# Altium PCB AudioAmpPCB.PcbDoc (part 1 of 2)
Units mm, origin at the board's own origin, x right, y up, seen from the top; angles counter-clockwise.
Board outline 120 x 80 mm, 2 copper layers (Top Layer, Bottom Layer); 101 components, 39 nets, 208 pads, 0 vias.
Unrouted connection lines stored in the file: 151.
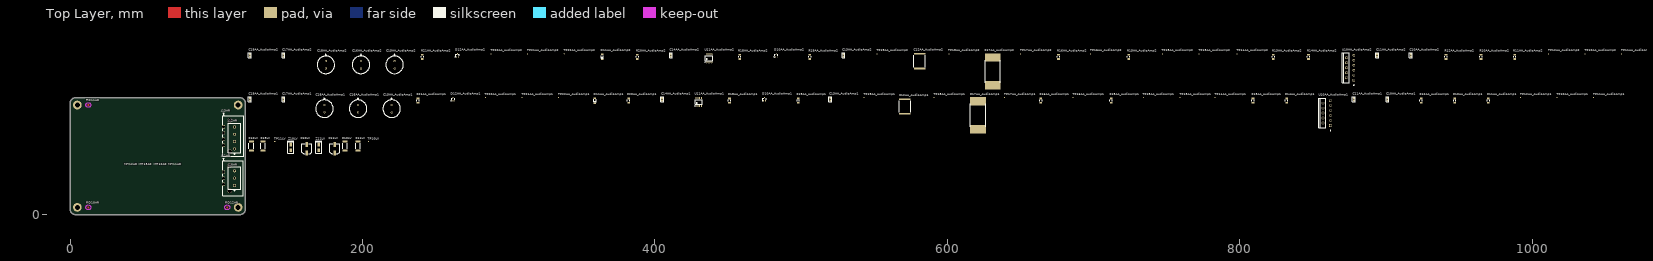
[diagram p0: Top Layer view]
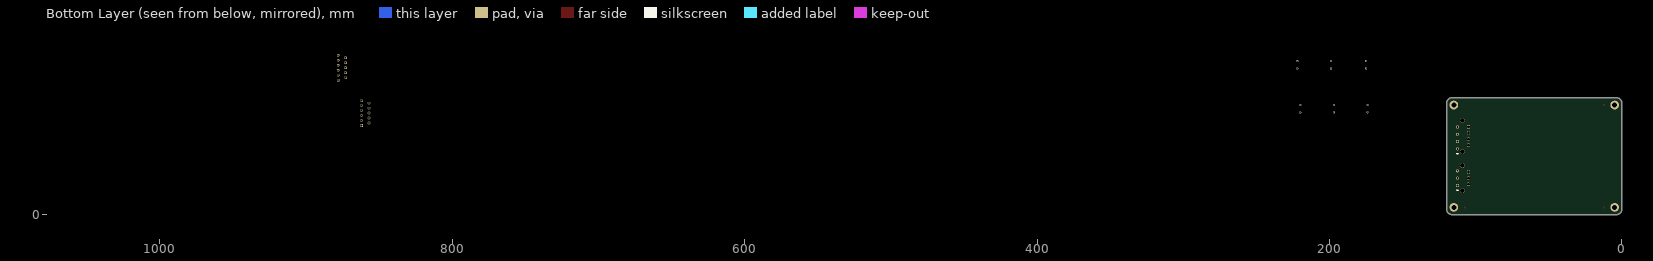
[diagram p1: Bottom Layer view, seen from below]

## Layer stack, top to bottom
Top Solder: solder mask 0.0102, Solder Resist, Dk 3.5
Top Layer: signal copper 0.0356
Dielectric 1: dielectric 0.32, FR-4, Dk 4.8
Bottom Layer: signal copper 0.0356
Bottom Solder: solder mask 0.0102, Solder Resist, Dk 3.5

## Board outline
0,4 ccw(c4,4) 4,0 116,0 ccw(c116,4) 120,4 120,76 ccw(c116,76) 116,80 4,80 ccw(c4,76) 0,76

## Design rules (kind name [scope] priority, off if disabled: settings)
Clearance [All] p1: gap=0.254 ignorepadtopadclearanceinfootprint=FALSE except(0: Arc-Hole Track-Hole SMDPad-Hole THPad-Hole Via-Hole Fill-Hole Poly-Hole Region-Hole Text-Hole)
PolygonConnect [All] p1: connectstyle=Relief reliefconductorwidth=0.254 reliefentries=4 polygonreliefangle="90 Angle" airgapwidth=0.254
RoomDefinition OASupply [InComponentClass('OASupply')] p1: confinementstyle=ConfineIn formatcopy=TRUE lockcomponents=FALSE outline 121,39 213,39 213,54 121,54
RoomDefinition AudioAmp2 [InComponentClass('AudioAmp2')] p2: confinementstyle=ConfineIn formatcopy=TRUE lockcomponents=FALSE outline 121,85 1085.001,85 1085.001,115 121,115
RoomDefinition AudioAmp1 [InComponentClass('AudioAmp1')] p3: confinementstyle=ConfineIn formatcopy=TRUE lockcomponents=FALSE outline 121,55 1065.001,55 1065.001,84 121,84
RoutingVias [All] p1: holewidth=0.711 width=1.27 viastyle="Through Hole" minholewidth=0.711 minwidth=1.27 maxholewidth=0.711 maxwidth=1.27
SolderMaskExpansion [All] p1: expansion=0.102 istentingtop=FALSE
Width [All] p1: maxlimit=0.254 minlimit=0.254 preferedwidth=0.254
30 further rules are at their usual default settings.

## Classes and differential pairs
channel class AudioAmplifier: AudioAmp1 AudioAmp2
component class OASupply: C10LV C11LV R10LV R11LV R12LV R13LV TP10LV TP11LV Z10LV Z11LV
component class Architecture: FID10AR FID11AR FID12AR J10AR J11AR J12AR J13AR MH10AR MH11AR MH12AR MH13AR
component class AudioAmp1: C10AA_AudioAmp1 C11AA_AudioAmp1 C12AA_AudioAmp1 C13AA_AudioAmp1 C14AA_AudioAmp1 C15AA_AudioAmp1 C16AA_AudioAmp1 C17AA_AudioAmp1 C18AA_AudioAmp1 C19AA_AudioAmp1 D10AA_AudioAmp1 D11AA_AudioAmp1 D12AA_AudioAmp1 R10AA_AudioAmp1 R11AA_AudioAmp1 R12AA_AudioAmp1 R13AA_AudioAmp1 R14AA_AudioAmp1 R15AA_AudioAmp1 R16AA_AudioAmp1 R17AA_AudioAmp1 R18AA_AudioAmp1 R19AA_AudioAmp1 R20AA_AudioAmp1 R21AA_AudioAmp1 TP10AA_AudioAmp1 TP11AA_AudioAmp1 TP12AA_AudioAmp1 TP13AA_AudioAmp1 TP14AA_AudioAmp1 TP15AA_AudioAmp1 TP16AA_AudioAmp1 TP17AA_AudioAmp1 TP18AA_AudioAmp1 TP19AA_AudioAmp1 TP20AA_AudioAmp1 TP21AA_AudioAmp1 TP22AA_AudioAmp1 U10AA_AudioAmp1 U11AA_AudioAmp1
component class AudioAmp2: C10AA_AudioAmp2 C11AA_AudioAmp2 C12AA_AudioAmp2 C13AA_AudioAmp2 C14AA_AudioAmp2 C15AA_AudioAmp2 C16AA_AudioAmp2 C17AA_AudioAmp2 C18AA_AudioAmp2 C19AA_AudioAmp2 D10AA_AudioAmp2 D11AA_AudioAmp2 D12AA_AudioAmp2 R10AA_AudioAmp2 R11AA_AudioAmp2 R12AA_AudioAmp2 R13AA_AudioAmp2 R14AA_AudioAmp2 R15AA_AudioAmp2 R16AA_AudioAmp2 R17AA_AudioAmp2 R18AA_AudioAmp2 R19AA_AudioAmp2 R20AA_AudioAmp2 R21AA_AudioAmp2 TP10AA_AudioAmp2 TP11AA_AudioAmp2 TP12AA_AudioAmp2 TP13AA_AudioAmp2 TP14AA_AudioAmp2 TP15AA_AudioAmp2 TP16AA_AudioAmp2 TP17AA_AudioAmp2 TP18AA_AudioAmp2 TP19AA_AudioAmp2 TP20AA_AudioAmp2 TP21AA_AudioAmp2 TP22AA_AudioAmp2 U10AA_AudioAmp2 U11AA_AudioAmp2

## Components (designator, comment, footprint, x,y, rotation, side; value= is the part's Value field where it differs from the comment)
C10AA_AudioAmp1 "GRM21A5C2D100JW01D" CAPC2012X10N-GRM0805-MURATA 901.001,79 r90 top (schematic designator C10AA)
C10AA_AudioAmp2 "GRM21A5C2D100JW01D" CAPC2012X10N-GRM0805-MURATA 917.001,109 r90 top (schematic designator C10AA)
C10LV "EEE-TQV101XAP" CAPAE7866X80M-PANASONIC-TQ-A 162,45 r90 top
C11AA_AudioAmp1 "GRM219R72A102KA01D" CAPC2012X10N-GRM0805-MURATA 878,79 r90 top (schematic designator C11AA)
C11AA_AudioAmp2 "GRM219R72A102KA01D" CAPC2012X10N-GRM0805-MURATA 894.001,109 r90 top (schematic designator C11AA)
C11LV "EEE-TQV101XAP" CAPAE7866X80M-PANASONIC-TQ-A 181,45 r90 top
C12AA_AudioAmp1 "SMDTC04100VA00KR00" Chip2PinSM127P600-8N-4030-SMD-PET-WIMA 571,74 r90 top (schematic designator C12AA)
C12AA_AudioAmp2 "SMDTC04100VA00KR00" Chip2PinSM127P600-8N-4030-SMD-PET-WIMA 581,105 r90 top (schematic designator C12AA)
C13AA_AudioAmp1 "GRM219R72A221KA01D" CAPC2012X10N-GRM0805-MURATA 520,79 r90 top (schematic designator C13AA)
C13AA_AudioAmp2 "GRM219R72A221KA01D" CAPC2012X10N-GRM0805-MURATA 529,109 r90 top (schematic designator C13AA)
C14AA_AudioAmp1 "GRM21A5C2D220JW01D" CAPC2012X10N-GRM0805-MURATA 405,79 r90 top (schematic designator C14AA)
C14AA_AudioAmp2 "GRM21A5C2D220JW01D" CAPC2012X10N-GRM0805-MURATA 411,109 r90 top (schematic designator C14AA)
C15AA_AudioAmp1 "ESH227M063AH4AA" Capacitor-KEMET-H4 220,70 r90 top (schematic designator C15AA)
C15AA_AudioAmp2 "ESH227M063AH4AA" Capacitor-KEMET-H4 222,100 r90 top (schematic designator C15AA)
C16AA_AudioAmp1 "ESH227M063AH4AA" Capacitor-KEMET-H4 197,70 r90 top (schematic designator C16AA)
C16AA_AudioAmp2 "ESH227M063AH4AA" Capacitor-KEMET-H4 199,100 r90 top (schematic designator C16AA)
C17AA_AudioAmp1 "GRM219R72A103KA01D" CAPC2012X10N-GRM0805-MURATA 146,79 r90 top (schematic designator C17AA)
C17AA_AudioAmp2 "GRM219R72A103KA01D" CAPC2012X10N-GRM0805-MURATA 146,109 r90 top (schematic designator C17AA)
C18AA_AudioAmp1 "ESH227M063AH4AA" Capacitor-KEMET-H4 174,70 r90 top (schematic designator C18AA)
C18AA_AudioAmp2 "ESH227M063AH4AA" Capacitor-KEMET-H4 175,100 r90 top (schematic designator C18AA)
C19AA_AudioAmp1 "GRM21BR72A104KAC4L" CAPC2012X10N-GRM0805-MURATA 123,79 r90 top (schematic designator C19AA)
C19AA_AudioAmp2 "GRM21BR72A104KAC4L" CAPC2012X10N-GRM0805-MURATA 123,109 r90 top (schematic designator C19AA)
D10AA_AudioAmp1 "BAV99W,LF" SOT65P210X100-3N-SOT-323-TOSHIBA 475,79 r90 top (schematic designator D10AA)
D10AA_AudioAmp2 "BAV99W,LF" SOT65P210X100-3N-SOT-323-TOSHIBA 483,109 r90 top (schematic designator D10AA)
D11AA_AudioAmp1 "BZV55-C27,115" DIOMELF3515N-SOD80C-NEXPERIA 359,78 r90 top (schematic designator D11AA)
D11AA_AudioAmp2 "BZV55-C27,115" DIOMELF3515N-SOD80C-NEXPERIA 364,108 r90 top (schematic designator D11AA)
D12AA_AudioAmp1 "BAV99W,LF" SOT65P210X100-3N-SOT-323-TOSHIBA 262,79 r90 top (schematic designator D12AA)
D12AA_AudioAmp2 "BAV99W,LF" SOT65P210X100-3N-SOT-323-TOSHIBA 265,109 r90 top (schematic designator D12AA)
FID10AR "FIDUCIAL_1mm" FID_1mm 12.5,5 r90 top
FID11AR "FIDUCIAL_1mm" FID_1mm 12.5,75 r90 top
FID12AR "FIDUCIAL_1mm" FID_1mm 107.5,5 r90 top
J10AR "282836-3" 282836-3_TYC 112.5,20 r90 top
J11AR "39-30-3032" CON_39303032 105,29.2 r90 top
J12AR "282836-4" 282836-4_TYC 112.5,45 r90 top
J13AR "39-30-3041" CON_39303041 105,60.1 r90 top
MH10AR "MetricDrillM3" MetricM3Hole#1 60,30 r90 top
MH11AR "MetricDrillM3" MetricM3Hole#2 70,30 r0 top
MH12AR "MetricDrillM3" MetricM3Hole#3 40,30 r90 top
MH13AR "MetricDrillM3" MetricM3Hole#2 50,30 r90 top
R10AA_AudioAmp1 "RK73H2BTTD4702F" Chip2PinSM127P600-8N-RK73H-1206-KOA 947.001,78 r90 top (schematic designator R10AA)
R10AA_AudioAmp2 "RK73H2BTTD4702F" Chip2PinSM127P600-8N-RK73H-1206-KOA 965.001,108 r90 top (schematic designator R10AA)
R10LV "ERJ-U1TF1101U" Chip2PinSM127P600-8N-PANASONIC-ERJU1T 188,47 r90 top
R11AA_AudioAmp1 "RK73B2BTTDD223J" Chip2PinSM127P600-8N-RK73H-1206-KOA 970.001,78 r90 top (schematic designator R11AA)
R11AA_AudioAmp2 "RK73B2BTTDD223J" Chip2PinSM127P600-8N-RK73H-1206-KOA 988.001,108 r90 top (schematic designator R11AA)
R11LV "ERJ-U1TF1101U" Chip2PinSM127P600-8N-PANASONIC-ERJU1T 197,47 r90 top
R12AA_AudioAmp1 "RK73B2BTTDD223J" Chip2PinSM127P600-8N-RK73H-1206-KOA 924.001,78 r90 top (schematic designator R12AA)
R12AA_AudioAmp2 "RK73B2BTTDD223J" Chip2PinSM127P600-8N-RK73H-1206-KOA 941.001,108 r90 top (schematic designator R12AA)
R12LV "ERJ-U1TF1101U" Chip2PinSM127P600-8N-PANASONIC-ERJU1T 124,47 r90 top
R13AA_AudioAmp1 "SG732BTTD474K" Chip2PinSM127P600-8N-RK73H-1206-KOA 809,78 r90 top (schematic designator R13AA)
R13AA_AudioAmp2 "SG732BTTD474K" Chip2PinSM127P600-8N-RK73H-1206-KOA 823,108 r90 top (schematic designator R13AA)
R13LV "ERJ-U1TF1101U" Chip2PinSM127P600-8N-PANASONIC-ERJU1T 132,47 r90 top
R14AA_AudioAmp1 "RK73B2BTTDD332J" Chip2PinSM127P600-8N-RK73H-1206-KOA 832,78 r90 top (schematic designator R14AA)
R14AA_AudioAmp2 "RK73B2BTTDD332J" Chip2PinSM127P600-8N-RK73H-1206-KOA 847,108 r90 top (schematic designator R14AA)
R15AA_AudioAmp1 "RK73H2BTTD4702F" Chip2PinSM127P600-8N-RK73H-1206-KOA 712,78 r90 top (schematic designator R15AA)
R15AA_AudioAmp2 "RK73H2BTTD4702F" Chip2PinSM127P600-8N-RK73H-1206-KOA 724,108 r90 top (schematic designator R15AA)
R16AA_AudioAmp1 "RK73B2BTTDD332J" Chip2PinSM127P600-8N-RK73H-1206-KOA 664,78 r90 top (schematic designator R16AA)
R16AA_AudioAmp2 "RK73B2BTTDD332J" Chip2PinSM127P600-8N-RK73H-1206-KOA 676,108 r90 top (schematic designator R16AA)
R17AA_AudioAmp1 "RWS7 R47 J T&R" Chip2PinSM127P600-8N-RWS7-OHMITE 621,68 r90 top (schematic designator R17AA)
R17AA_AudioAmp2 "RWS7 R47 J T&R" Chip2PinSM127P600-8N-RWS7-OHMITE 631,98 r90 top (schematic designator R17AA)
R18AA_AudioAmp1 "RK73B2BTTDD104J" Chip2PinSM127P600-8N-RK73H-1206-KOA 451,78 r90 top (schematic designator R18AA)
R18AA_AudioAmp2 "RK73B2BTTDD104J" Chip2PinSM127P600-8N-RK73H-1206-KOA 458,108 r90 top (schematic designator R18AA)
R19AA_AudioAmp1 "RK73B2BTTDD223J" Chip2PinSM127P600-8N-RK73H-1206-KOA 498,78 r90 top (schematic designator R19AA)
R19AA_AudioAmp2 "RK73B2BTTDD223J" Chip2PinSM127P600-8N-RK73H-1206-KOA 506,108 r90 top (schematic designator R19AA)
R20AA_AudioAmp1 "RK73B2BTTD103G" Chip2PinSM127P600-8N-RK73H-1206-KOA 382,78 r90 top (schematic designator R20AA)
R20AA_AudioAmp2 "RK73B2BTTD103G" Chip2PinSM127P600-8N-RK73H-1206-KOA 388,108 r90 top (schematic designator R20AA)
R21AA_AudioAmp1 "RK73B2BTTDD391J" Chip2PinSM127P600-8N-RK73H-1206-KOA 238,78 r90 top (schematic designator R21AA)
R21AA_AudioAmp2 "RK73B2BTTDD391J" Chip2PinSM127P600-8N-RK73H-1206-KOA 241,108 r90 top (schematic designator R21AA)
TP10AA_AudioAmp1 "TP_0.75mm" Pad_0.75mm 1017.001,80 r90 top (schematic designator TP10AA)
TP10AA_AudioAmp2 "TP_0.75mm" Pad_0.75mm 1036.001,110 r90 top (schematic designator TP10AA)
TP10LV "TP_0.75mm" Pad_0.75mm 204,50 r90 top
TP11AA_AudioAmp1 "TP_0.75mm" Pad_0.75mm 1042.001,80 r90 top (schematic designator TP11AA)
TP11AA_AudioAmp2 "TP_0.75mm" Pad_0.75mm 1061.001,110 r90 top (schematic designator TP11AA)
TP11LV "TP_0.75mm" Pad_0.75mm 140,50 r90 top
TP12AA_AudioAmp1 "TP_0.75mm" Pad_0.75mm 992.001,80 r90 top (schematic designator TP12AA)
TP12AA_AudioAmp2 "TP_0.75mm" Pad_0.75mm 1011.001,110 r90 top (schematic designator TP12AA)
TP13AA_AudioAmp1 "TP_0.75mm" Pad_0.75mm 759,80 r90 top (schematic designator TP13AA)
TP13AA_AudioAmp2 "TP_0.75mm" Pad_0.75mm 772,110 r90 top (schematic designator TP13AA)
TP14AA_AudioAmp1 "TP_0.75mm" Pad_0.75mm 783,80 r90 top (schematic designator TP14AA)
TP14AA_AudioAmp2 "TP_0.75mm" Pad_0.75mm 798,110 r90 top (schematic designator TP14AA)
TP15AA_AudioAmp1 "TP_0.75mm" Pad_0.75mm 734,80 r90 top (schematic designator TP15AA)
TP15AA_AudioAmp2 "TP_0.75mm" Pad_0.75mm 747,110 r90 top (schematic designator TP15AA)
TP16AA_AudioAmp1 "TP_0.75mm" Pad_0.75mm 686,80 r90 top (schematic designator TP16AA)
TP16AA_AudioAmp2 "TP_0.75mm" Pad_0.75mm 698,110 r90 top (schematic designator TP16AA)
TP17AA_AudioAmp1 "TP_0.75mm" Pad_0.75mm 639,80 r90 top (schematic designator TP17AA)
TP17AA_AudioAmp2 "TP_0.75mm" Pad_0.75mm 650,110 r90 top (schematic designator TP17AA)
TP18AA_AudioAmp1 "TP_0.75mm" Pad_0.75mm 591,80 r90 top (schematic designator TP18AA)
TP18AA_AudioAmp2 "TP_0.75mm" Pad_0.75mm 601,110 r90 top (schematic designator TP18AA)
TP19AA_AudioAmp1 "TP_0.75mm" Pad_0.75mm 543,80 r90 top (schematic designator TP19AA)
TP19AA_AudioAmp2 "TP_0.75mm" Pad_0.75mm 552,110 r90 top (schematic designator TP19AA)
TP20AA_AudioAmp1 "TP_0.75mm" Pad_0.75mm 284,80 r90 top (schematic designator TP20AA)
TP20AA_AudioAmp2 "TP_0.75mm" Pad_0.75mm 288,110 r90 top (schematic designator TP20AA)
TP21AA_AudioAmp1 "TP_0.75mm" Pad_0.75mm 309,80 r90 top (schematic designator TP21AA)
TP21AA_AudioAmp2 "TP_0.75mm" Pad_0.75mm 313,110 r90 top (schematic designator TP21AA)
TP22AA_AudioAmp1 "TP_0.75mm" Pad_0.75mm 334,80 r90 top (schematic designator TP22AA)
TP22AA_AudioAmp2 "TP_0.75mm" Pad_0.75mm 338,110 r90 top (schematic designator TP22AA)
U10AA_AudioAmp1 "LM3886T" TF11B 862,61 r90 top (schematic designator U10AA)
U10AA_AudioAmp2 "LM3886T" TF11B 878,92 r90 top (schematic designator U10AA)
U11AA_AudioAmp1 "LM318M/NOPB" SOIC127P600X175-8N-SOIC8-D0008A-TI 430,77 r90 top (schematic designator U11AA)
U11AA_AudioAmp2 "LM318M/NOPB" SOIC127P600X175-8N-SOIC8-D0008A-TI 437,107 r90 top (schematic designator U11AA)
Z10LV "SMAZ15-13-F" DIODESINC-SMA 151,46 r90 top
Z11LV "SMAZ15-13-F" DIODESINC-SMA 170,46 r90 top

## Footprints (in the part's own frame and the unit in brackets; to place one, negate y for a bottom-side part, rotate by r counter-clockwise, add the part's x,y. Pads: shape width x height; smd on the part's side, far side on the other; paste and mask are expansions set on the pad)
282836-3_TYC [mil]
  round 80 hole 50 mask+0: 1(0,0) 2(196.85,0) 3(393.7,0)
  silkscreen extent -143,-166 497,166
282836-4_TYC [mil]
  round 80 hole 50 mask+0: 1(0,0) 2(196.85,0) 3(393.7,0) 4(590.55,0)
  silkscreen extent -143,-166 694,166, body extent -134,-161 677,161, height 394
Capacitor-KEMET-H4 [mm]
  round 1.4 hole 1: 1(5,0) 2(0,0)
  silkscreen extent -3.5,-6 10.05,6, body extent -2.75,-5.25 7.75,5.25, height 23
CAPAE7866X80M-PANASONIC-TQ-A [mm] "Aluminum Electrolytic Capacitor, Body 6.60x6.60x8.00mm, IPC Low Density"
  rect 3.45x1.8 smd: 1(-2.95,0) 2(2.95,0)
  silkscreen extent -3.4,-3.4 3.4,3.4, body extent -3.9,-3.4 3.9,3.4, height 8
CAPC2012X10N-GRM0805-MURATA [mm] "Chip Capacitor, 2-Leads, Body 2.00x1.25mm, IPC Medium Density"
  rect 1.2x1.4 smd: 1(-0.85,0) 2(0.85,0)
  silkscreen extent -1.7,-0.95 1.7,0.95, body extent -1.05,-0.67 1.05,0.67, height 0.95
Chip2PinSM127P600-8N-4030-SMD-PET-WIMA [mm]
  rect 1.15x7.9 smd: 1(-5.025,0) 2(5.025,0)
  silkscreen extent -4.05,-3.85 4.05,3.85, body extent -5.25,-3.95 5.25,3.95, height 5.3
Chip2PinSM127P600-8N-PANASONIC-ERJU1T [mm]
  rect 1.35x3.4 smd: 1(-2.975,0) 2(2.975,0)
  silkscreen extent -1.9,-1.6 1.9,1.6, body extent -3.3,-1.7 3.3,1.7, height 0.7
Chip2PinSM127P600-8N-RK73H-1206-KOA [mm]
  rect 1.15x1.8 smd: 1(-1.475,0) 2(1.475,0)
  silkscreen extent -0.5,-0.8 0.5,0.8, body extent -1.7,-0.9 1.7,0.9, height 0.7
Chip2PinSM127P600-8N-RWS7-OHMITE [mm]
  rect 5.7x10.7 smd: 1(-9.475,0) 2(9.475,0)
  silkscreen extent -7.75,-5.25 7.75,5.25, body extent -10.45,-5.35 10.45,5.35, height 10.7
CON_39303032 [mm]
  rect 2.3x2.3 hole 1.8 mask+0.076: 1(0,0)
  round 2.3 hole 1.8 mask+0.076: 2(-4.2,0) 3(-8.4,0)
  round 3.2 hole 3.2 unplated mask+0.076: M1(4.5,-4.2) M2(-12.9,-4.2)
  silkscreen extent -16.1,-13.55 9.48,0.64, body extent -16.1,-13.5 7.7,0.59, height 7.2
CON_39303041 [mm]
  rect 2.3x2.3 hole 1.8 mask+0.076: 1(0,0)
  round 2.3 hole 1.8 mask+0.076: 2(-4.2,0) 3(-8.4,0) 4(-12.6,0)
  round 3.2 hole 3.2 unplated mask+0.076: M1(4.5,-4.2) M2(-17.1,-4.2)
  silkscreen extent -20.3,-13.9 9.48,0.64, body extent -20.3,-13.9 7.7,0.5, height 7.2
DIODESINC-SMA [mm]
  rect 2.5x1.7 smd: A(-2,0) K(2,0)
  silkscreen extent -4,-2 4.4,2
DIOMELF3515N-SOD80C-NEXPERIA [mm] "MELF Diode, 2-Leads, Body 3.50x1.53mm, IPC Medium Density"
  rect 1x1.75 smd: 1(-1.75,0) 2(1.75,0)
  silkscreen extent -0.85,-0.77 0.85,0.78, body extent -1.75,-0.76 1.75,0.76, height 1.53
FID_1mm [mm]
  Top Layer region: -0.5,0 -0.462,-0.191 -0.354,-0.354 -0.191,-0.462 0,-0.5 0,-0.5 0.191,-0.462 0.354,-0.354 0.462,-0.191 0.5,0 0.5,0 0.462,0.191 0.354,0.354 0.191,0.462 0,0.5 0,0.5 -0.191,0.462 -0.354,0.354 -0.462,0.191 -0.5,0
  Top Layer keep-out region: 0,-1.7 -0.651,-1.571 -1.202,-1.202 -1.571,-0.651 -1.7,0 -1.7,0 -1.571,0.651 -1.202,1.202 -0.651,1.571 0,1.7 0,1.7 0.651,1.571 1.202,1.202 1.571,0.651 1.7,0 1.7,0 1.571,-0.651 1.202,-1.202 0.651,-1.571 0,-1.7
  body extent -1.7,-1.7 1.7,1.7, height 1.27
MetricM3Hole#1 [mm]
  round 6 hole 3.5: 1(-25,-55)
MetricM3Hole#2 [mm]
  round 6 hole 3.5: 1(45,45)
MetricM3Hole#3 [mm]
  round 6 hole 3.5: 1(-25,35)
Pad_0.75mm [mm]
  round 0.75 smd: 1(0,0)
SOIC127P600X175-8N-SOIC8-D0008A-TI [mm] "SOIC, 8-Leads, Body 4.91x3.90mm, Pitch 1.27mm, IPC Medium Density"
  oval 1.45x0.6 smd: 1(-2.725,1.905) 2(-2.725,0.635) 3(-2.725,-0.635) 4(-2.725,-1.905) 5(2.725,-1.905) 6(2.725,-0.635) 7(2.725,0.635) 8(2.725,1.905)
  silkscreen extent -2.85,-2.5 1.6,2.88, body extent -3,-2.5 3,2.5, height 1.75
SOT65P210X100-3N-SOT-323-TOSHIBA [mm] "3-Leads, Body 2.00x2.10mm, Pitch 0.65mm, IPC Medium Density"
  rect 0.8x0.55 smd: 1(-1.075,0.65) 2(-1.075,-0.65) 3(1.075,0)
  silkscreen extent -1.2,-1.1 0.67,1.6, body extent -1.1,-1.1 1.1,1.1, height 1
TF11B [mil]
  rect 70x70 hole 50 mask+0: 1(0,0)
  round 70 hole 50 mask+0: 2(67,200) 3(134,0) 4(201,200) 5(268,0) 6(335,200) 7(402,0) 8(469,200) 9(536,0) 10(603,200) 11(670,0)
  silkscreen extent -144,-8 737,318, body extent -61,-20 732,313, height 1104

## Part data
C10AA_AudioAmp1 C10AA_AudioAmp2: "Cap Ceramic 10pF 200V C0G 5% Pad SMD 0805 125C T/R", Capacitance=10pF, Case/Package=0805, Dielectric=C0G, Manufacturer=Murata, Max Operating Temperature=125°C, Min Operating Temperature=-55°C, Tolerance=5%, Voltage Rating=200V, Category="Ceramic Capacitors", ComponentLink1Description=https://search.murata.co.jp/Ceramy/image/img/A01X/G101/ENG/GRM21A5C2D100JW01-01.pdf?src-supplier=Digi-Key, ComponentLink1URL=https://search.murata.co.jp/Ceramy/image/img/A01X/G101/ENG/GRM21A5C2D100JW01-01.pdf?src-supplier=Digi-Key, ComponentLink2Description=http://search.murata.co.jp/Ceramy/image/img/A01X/G101/ENG/GRM21A5C2D100JW01-01.pdf?src-supplier=Digi-Key, ComponentLink2URL=http://search.murata.co.jp/Ceramy/image/img/A01X/G101/ENG/GRM21A5C2D100JW01-01.pdf?src-supplier=Digi-Key, Length=0.079inch, Manufacturer Part Number=GRM21A5C2D100JW01D, Mount="Surface Mount", Packaging="Tape and Reel", Pricing 1="1=0.27880, 10=0.18960, 25=0.18290, 100=0.10650, 250=0.10520, 500=0.07580, 1000=0.06340, 3000=0.06300 (USD)", RoHS=Yes, RoHS Compliant=Yes, Stock 1=3605, Supplier 1="Arrow Electronics", Thickness=0.051inch, Voltage Rating (DC)=200V, Width=0.049inch
C10LV C11LV: "Cap Aluminum 100uF 35V 20% (6.3 X 7.7mm) SMD 0.0003 Ohm 197mA 2000 hr 125°C T/R", Capacitance=100uF, Case/Package=Radial, ESR (Equivalent Series Resistance)=300mR, Manufacturer=Panasonic, Max Operating Temperature=125°C, Min Operating Temperature=-40°C, Package Quantity=900, Ripple Current=197mA, Tolerance=20%, Voltage=35V, Category="Aluminum Electrolytic Capacitors", ComponentLink1Description=https://datasheet.ciiva.com/23859/aba0000ce139-23859013.pdf?src-supplier=Newark, ComponentLink1URL=https://datasheet.ciiva.com/23859/aba0000ce139-23859013.pdf?src-supplier=Newark, ComponentLink2Description=https://datasheet.ciiva.com/30502/0900766b81183640-30502676.pdf?src-supplier=RSComponents, ComponentLink2URL=https://datasheet.ciiva.com/30502/0900766b81183640-30502676.pdf?src-supplier=RSComponents, ComponentLink3Description=https://datasheet.ciiva.com/30198/aba0000ce139-30198276.pdf?src-supplier=Onlinecomponents.com, ComponentLink3URL=https://datasheet.ciiva.com/30198/aba0000ce139-30198276.pdf?src-supplier=Onlinecomponents.com, ComponentLink4Description=https://datasheet.ciiva.com/14497/1679509-14497981.pdf?src-supplier=Farnell, ComponentLink4URL=https://datasheet.ciiva.com/14497/1679509-14497981.pdf?src-supplier=Farnell, ComponentLink5Description=https://datasheet.ciiva.com/22683/1679509-22683999.pdf?src-supplier=Element14, ComponentLink5URL=https://datasheet.ciiva.com/22683/1679509-22683999.pdf?src-supplier=Element14, ComponentLink6Description=https://datasheet.ciiva.com/15934/aba0000ce139-15934059.pdf?src-supplier=Onlinecomponents.com, ComponentLink6URL=https://datasheet.ciiva.com/15934/aba0000ce139-15934059.pdf?src-supplier=Onlinecomponents.com, Construction=Cylindrical, Diameter=6.3mm, Height=7.7mm, Height - Seated (Max)=0.315inch, Lead Diameter=0.65mm, Lead Free="Lead Free", Lead Pitch=1.8mm, Length=7.7mm, Life (Hours)=2000Hour, Manufacturer Part Number=EEE-TQV101XAP, Mount="Surface Mount", Number of Pins=8, Packaging="Tape and Reel", Pricing 1="5=1.00000, 50=0.75600, 250=0.54600, 500=0.36400, 900=0.35000 (EUR)", REACH SVHC="No SVHC", Ripple Current (AC)=197mA, RoHS=Yes, RoHS Compliant=Yes, Series=TQ, Stock 1=10800, Supplier 1=RSComponents, Termination=SMD/SMT, Voltage Rating=35V, Voltage Rating (DC)=35V
C11AA_AudioAmp1 C11AA_AudioAmp2: "0805 1 nF 100 V ±10 % Tolerance X7R Surface Mount Multilayer Ceramic Capacitor", Capacitance=1nF, Case Code (Imperial)=0805, Case Code (Metric)=2012, Dielectric=X7R, Dielectric Material=Ceramic, Manufacturer=Murata, Max Operating Temperature=125°C, Min Operating Temperature=-55°C, Package Quantity=4000, Tolerance=10%, Voltage=100V, Case/Package=0805, Category="Ceramic Capacitors", ComponentLink1Description=https://datasheet.ciiva.com/5418/product-5418996.pdf?src-supplier=Mouser, ComponentLink1URL=https://datasheet.ciiva.com/5418/product-5418996.pdf?src-supplier=Mouser, ComponentLink2Description=https://datasheet.ciiva.com/29200/452953-da-01-en-vs-kondensator-0805-29200622.pdf?src-supplier=Conrad, ComponentLink2URL=https://datasheet.ciiva.com/29200/452953-da-01-en-vs-kondensator-0805-29200622.pdf?src-supplier=Conrad, ComponentLink3Description=https://datasheet.ciiva.com/166/partnumbering-e-01-166386.pdf?src-supplier=Digi-Key, ComponentLink3URL=https://datasheet.ciiva.com/166/partnumbering-e-01-166386.pdf?src-supplier=Digi-Key, ComponentLink4Description=https://datasheet.ciiva.com/11621/c02e-11621626.pdf?src-supplier=Avnet, ComponentLink4URL=https://datasheet.ciiva.com/11621/c02e-11621626.pdf?src-supplier=Avnet, ComponentLink5Description=https://datasheet.ciiva.com/2989/c02e-2989678.pdf?src-supplier=Avnet, ComponentLink5URL=https://datasheet.ciiva.com/2989/c02e-2989678.pdf?src-supplier=Avnet, Construction=Flat, Depth=1.25mm, Dissipation Factor=0.025%, Height=0.85mm, Lead Free="Lead Free", Length=2mm, Manufacturer Part Number=GRM219R72A102KA01D, Material=Ceramic, Mount="Surface Mount", Packaging="Tape and Reel", Pricing 1="1=0.16850, 10=0.12550, 25=0.12080, 100=0.06030, 250=0.05970, 500=0.04130, 1000=0.03450 (USD)", Radiation Hardening=No, RoHS=Yes, RoHS Compliant=Yes, Series=GRM, Stock 1=2320, Supplier 1="Arrow Electronics", Termination=SMD/SMT, Thickness=0.037inch, Voltage Rating=100V, Voltage Rating (DC)=100V, Width=0.049inch
C12AA_AudioAmp1 C12AA_AudioAmp2: "Cap Film 1UF 10% 63VDC 4030", Capacitance=1uF, Case/Package=4030, Manufacturer=WIMA, Max Operating Temperature=100°C, Min Operating Temperature=-55°C, Package Quantity=775, Tolerance=10%, Voltage Rating=63V, Voltage Rating (AC)=40V, Category="Film Capacitors", ComponentLink1Description=https://datasheet.ciiva.com/13373/wima-smd-pet-10719-13373865.pdf?src-supplier=Mouser, ComponentLink1URL=https://datasheet.ciiva.com/13373/wima-smd-pet-10719-13373865.pdf?src-supplier=Mouser, Manufacturer Part Number=SMDTC04100VA00KR00, Packaging="Tape and Reel", Pricing 1="1=1.62000, 10=1.29000, 50=1.29000, 100=0.96200, 1000=0.64100, 10000=0.55700 (USD)", RoHS=Yes, Stock 1=709, Supplier 1=Mouser, Termination=SMD/SMT, Voltage Rating (DC)=63V
C13AA_AudioAmp1 C13AA_AudioAmp2: "Cap Ceramic 220pF 100V X7R 10% SMD 0805 125°C Paper T/R", Capacitance=220pF, Case Code (Imperial)=0805, Case Code (Metric)=2012, Dielectric=X7R, Manufacturer=Murata, Max Operating Temperature=125°C, Min Operating Temperature=-55°C, Package Quantity=4000, Tolerance=10%, Voltage Rating=100V, Case/Package=0805, Category="Ceramic Capacitors", ComponentLink1Description=https://datasheet.ciiva.com/167/partnumbering-e-01-167705.pdf?src-supplier=Digi-Key, ComponentLink1URL=https://datasheet.ciiva.com/167/partnumbering-e-01-167705.pdf?src-supplier=Digi-Key, Construction=Flat, Depth=1.25mm, Height=0.85mm, Length=2mm, Manufacturer Part Number=GRM219R72A221KA01D, Mount="Surface Mount", Packaging="Tape and Reel", Pricing 1="1=0.23000, 10=0.15800, 50=0.15800, 100=0.08800, 1000=0.05300, 10000=0.03900 (USD)", Radiation Hardening=No, RoHS=Yes, RoHS Compliant=Yes, Series=GRM, Stock 1=2206, Supplier 1=Mouser, Termination=SMD/SMT, Thickness=0.037inch, Voltage Rating (DC)=100V, Width=0.049inch
C14AA_AudioAmp1 C14AA_AudioAmp2: "Cap Ceramic 22pF 200V C0G 5% SMD 0805 125°C Paper T/R", Capacitance=22pF, Case/Package=0805, Dielectric=C0G, Manufacturer=Murata, Max Operating Temperature=125°C, Min Operating Temperature=-55°C, Tolerance=5%, Voltage Rating=200V, Category="Ceramic Capacitors", ComponentLink1Description=https://search.murata.co.jp/Ceramy/image/img/A01X/G101/ENG/GRM21A5C2D220JW01-01.pdf?src-supplier=Digi-Key, ComponentLink1URL=https://search.murata.co.jp/Ceramy/image/img/A01X/G101/ENG/GRM21A5C2D220JW01-01.pdf?src-supplier=Digi-Key, ComponentLink2Description=http://search.murata.co.jp/Ceramy/image/img/A01X/G101/ENG/GRM21A5C2D220JW01-01.pdf?src-supplier=Digi-Key, ComponentLink2URL=http://search.murata.co.jp/Ceramy/image/img/A01X/G101/ENG/GRM21A5C2D220JW01-01.pdf?src-supplier=Digi-Key, Length=0.079inch, Manufacturer Part Number=GRM21A5C2D220JW01D, Mount="Surface Mount", Packaging="Tape and Reel", Pricing 1="1=0.04630 (USD)", RoHS=Yes, RoHS Compliant=Yes, Stock 1=2, Supplier 1="Arrow Electronics", Thickness=0.051inch, Voltage Rating (DC)=200V, Width=0.049inch
C15AA_AudioAmp1 C15AA_AudioAmp2 C16AA_AudioAmp1 C16AA_AudioAmp2 C18AA_AudioAmp1 C18AA_AudioAmp2: "Cap, 220ΜF, 63V, 20%", Capacitance=220uF, Case/Package=Radial, Manufacturer=KEMET, Max Operating Temperature=105°C, Min Operating Temperature=-25°C, Tolerance=20%, Voltage Rating=63V, Category="Aluminum Electrolytic Capacitors", ComponentLink1Description=https://datasheet.ciiva.com/22620/1794402-22620869.pdf?src-supplier=Element14, ComponentLink1URL=https://datasheet.ciiva.com/22620/1794402-22620869.pdf?src-supplier=Element14, Diameter=10mm, Height=19mm, Lead Pitch=5mm, Life (Hours)=2000Hour, Manufacturer Part Number=ESH227M063AH4AA, Pricing 1="1=0.58000, 10=0.40900, 50=0.30900, 100=0.26900, 1000=0.26900, 10000=0.26900 (USD)", REACH SVHC="No SVHC", RoHS=Yes, RoHS Compliant=Yes, Stock 1=236, Supplier 1=Mouser, Voltage Rating (DC)=63V
C17AA_AudioAmp1 C17AA_AudioAmp2: "Cap Ceramic 0.01uF 100V X7R 10% SMD 0805 125°C Paper T/R", Capacitance=10nF, Case Code (Imperial)=0805, Case Code (Metric)=2012, Dielectric=X7R, Manufacturer=Murata, Max Operating Temperature=125°C, Min Operating Temperature=-55°C, Package Quantity=4000, Resistor Type=Ceramic, Tolerance=10%, Voltage Rating=100V, Case/Package=0805, Category="Ceramic Capacitors", ComponentLink1Description=http://www.mouser.com/ds/2/281/c02e-2905.pdf?src-supplier=Mouser, ComponentLink1URL=http://www.mouser.com/ds/2/281/c02e-2905.pdf?src-supplier=Mouser, ComponentLink2Description=https://search.murata.co.jp/Ceramy/image/img/A01X/G101/ENG/GRM219R72A103KA01-01.pdf?src-supplier=Digi-Key, ComponentLink2URL=https://search.murata.co.jp/Ceramy/image/img/A01X/G101/ENG/GRM219R72A103KA01-01.pdf?src-supplier=Digi-Key, Depth=1.25mm, Height=0.85mm, Length=2mm, Manufacturer Part Number=GRM219R72A103KA01D, Mount="Surface Mount", Packaging="Tape and Reel", Pricing 1="1=0.19160, 10=0.16510, 25=0.16340, 100=0.07650, 250=0.07580, 500=0.05240, 1000=0.04340 (USD)", RoHS=Yes, RoHS Compliant=Yes, Stock 1=2008, Supplier 1="Arrow Electronics", Termination=SMD/SMT, Thickness=0.037inch, Voltage Rating (DC)=100V, Weight=0.000335oz, Width=0.049inch
C19AA_AudioAmp1 C19AA_AudioAmp2: "0805 0.1 uF 100 V ±10% Tolerance X7R SMT Multilayer Ceramic Capacitor", Capacitance=100nF, Case Code (Imperial)=0805, Case Code (Metric)=2012, Dielectric=X7R, Dielectric Material=Ceramic, Manufacturer=Murata, Max Operating Temperature=125°C, Min Operating Temperature=-55°C, Tolerance=10%, Voltage=100V, Case/Package=0805, Category="Ceramic Capacitors", ComponentLink1Description=http://search.murata.co.jp/Ceramy/image/img/A01X/G101/ENG/GRM21BR72A104KAC4-01.pdf?src-supplier=Digi-Key, ComponentLink1URL=http://search.murata.co.jp/Ceramy/image/img/A01X/G101/ENG/GRM21BR72A104KAC4-01.pdf?src-supplier=Digi-Key, Construction=Flat, Depth=1.25mm, Dissipation Factor=0.05%, Height=1.25mm, Lead Free="Lead Free", Length=2mm, Manufacturer Part Number=GRM21BR72A104KAC4L, Mount="Surface Mount", Packaging="Tape and Reel", Pricing 1="1=0.26170, 10=0.12880, 25=0.12760, 100=0.10330, 250=0.10110, 500=0.07210, 1000=0.06190, 3000=0.06120, 6000=0.06030, 15000=0.05530 (USD)", RoHS=Yes, RoHS Compliant=Yes, Series=GRM, Stock 1=15610, Supplier 1="Arrow Electronics", Termination=SMD/SMT, Thickness=0.053inch, Voltage Rating=100V, Voltage Rating (DC)=100V, Width=0.049inch
D10AA_AudioAmp1 D10AA_AudioAmp2 D12AA_AudioAmp1 D12AA_AudioAmp2: "Switching Diode Series 0.9pF 100V 3-Pin SOT-323", Manufacturer=Toshiba, Category="Rectifier Diodes", Manufacturer Part Number=BAV99W,LF, Pricing 1="1=0.22000, 10=0.20200, 50=0.20200, 100=0.11000, 1000=0.04700, 10000=0.03900 (USD)", RoHS=No, Stock 1=14403, Supplier 1=Mouser
D11AA_AudioAmp1 D11AA_AudioAmp2: "Zener diode BZV55C27 Hottech; SMD; MiniMELF, LL-34 (SOD-80); 27V; 0, 5W; 5%", Manufacturer=Nexperia, Category="Zener Diodes", ComponentLink1Description=http://www.farnell.com/datasheets/1498690.pdf?src-supplier=Farnell, ComponentLink1URL=http://www.farnell.com/datasheets/1498690.pdf?src-supplier=Farnell, ComponentLink2Description=https://assets.nexperia.com/documents/data-sheet/BZV55_SER.pdf?src-supplier=Digi-Key, ComponentLink2URL=https://assets.nexperia.com/documents/data-sheet/BZV55_SER.pdf?src-supplier=Digi-Key, Manufacturer Part Number=BZV55-C27,115, Pricing 1="1=0.19000, 10=0.17500, 100=0.09520, 500=0.05856, 1000=0.03993 (USD)", RoHS=Yes, RoHS Compliant=Yes, Stock 1=153, Supplier 1=Digi-Key
FID10AR FID11AR FID12AR: "FIDUCIAL_1mm 40 mil diam120mil mask"
J10AR: "Connector, Terminal Block; Wire Receptacle; 3 Pos.; 16-30 AWG; 0.197 in. CL; Sid", Manufacturer="TE Connectivity", Category="Terminal Blocks", ComponentLink1Description=https://datasheet.ciiva.com/16305/eng-cs-1308389-eurostyle-terminal-blocks-0607-16305242.pdf?src-supplier=Future+Electronics, ComponentLink1URL=https://datasheet.ciiva.com/16305/eng-cs-1308389-eurostyle-terminal-blocks-0607-16305242.pdf?src-supplier=Future+Electronics, ComponentLink2Description=https://datasheet.ciiva.com/15169/getdatasheetpartid-155856-15169554.pdf?src-supplier=Verical, ComponentLink2URL=https://datasheet.ciiva.com/15169/getdatasheetpartid-155856-15169554.pdf?src-supplier=Verical, ComponentLink3Description=https://datasheet.ciiva.com/19460/750661-19460522.pdf?src-supplier=Jameco, ComponentLink3URL=https://datasheet.ciiva.com/19460/750661-19460522.pdf?src-supplier=Jameco, ComponentLink4Description=https://datasheet.ciiva.com/11757/0900766b8002dc8a-11757406.pdf?src-supplier=RSComponents, ComponentLink4URL=https://datasheet.ciiva.com/11757/0900766b8002dc8a-11757406.pdf?src-supplier=RSComponents, ComponentLink5Description=https://datasheet.ciiva.com/30106/eng-cs-1308389-eurostyle-terminal-blocks-0607-30106198.pdf?src-supplier=Onlinecomponents.com, ComponentLink5URL=https://datasheet.ciiva.com/30106/eng-cs-1308389-eurostyle-terminal-blocks-0607-30106198.pdf?src-supplier=Onlinecomponents.com, ComponentLink6Description=https://datasheet.ciiva.com/14606/70086276-14606907.pdf?src-supplier=Allied+Electronics, ComponentLink6URL=https://datasheet.ciiva.com/14606/70086276-14606907.pdf?src-supplier=Allied+Electronics, ComponentLink7Description=https://datasheet.ciiva.com/3141/eng-cs-1308389-eurostyle-terminal-blocks-0607-3141119.pdf?src-supplier=Avnet, ComponentLink7URL=https://datasheet.ciiva.com/3141/eng-cs-1308389-eurostyle-terminal-blocks-0607-3141119.pdf?src-supplier=Avnet, ComponentLink8Description=https://datasheet.ciiva.com/823/eng-cd-282836-h10-823445.pdf?src-supplier=Digi-Key, ComponentLink8URL=https://datasheet.ciiva.com/823/eng-cd-282836-h10-823445.pdf?src-supplier=Digi-Key, Manufacturer Part Number=282836-3, Pricing 1="1=1.07040, 10=0.71690, 100=0.59380, 600=0.59230, 1000=0.53630, 4800=0.50760 (USD)", RoHS=Yes, Stock 1=17595, Supplier 1="Arrow Electronics"
J11AR: "Conn Power HDR 3 POS 4.2mm Solder RA Thru-Hole 3 Terminal 1 Port Mini-Fit Jr™ Frame", Manufacturer=Molex, Category="Headers and Wire Housings", ComponentLink1Description=https://datasheet.ciiva.com/5155/0039303032-pcb-headers-160103-5155392.pdf?src-supplier=Mouser, ComponentLink1URL=https://datasheet.ciiva.com/5155/0039303032-pcb-headers-160103-5155392.pdf?src-supplier=Mouser, ComponentLink2Description=https://datasheet.ciiva.com/30191/34870039303032-pcb-headers-30191281.pdf?src-supplier=Onlinecomponents.com, ComponentLink2URL=https://datasheet.ciiva.com/30191/34870039303032-pcb-headers-30191281.pdf?src-supplier=Onlinecomponents.com, Manufacturer Part Number=39-30-3032, Pricing 1="1=1.33000, 10=1.22000, 50=1.10000, 100=0.91400, 500=0.82300, 1000=0.73100 (EUR)", RoHS=Yes, Stock 1=6, Supplier 1=Farnell
J12AR: "Connector, Terminal Block; Wire Receptacle; 4 Pos.; 16-30 AWG; 0.197 in. CL; Sid", Manufacturer="TE Connectivity", Category="Terminal Blocks", ComponentLink1Description=https://datasheet.ciiva.com/19460/750670-19460514.pdf?src-supplier=Jameco, ComponentLink1URL=https://datasheet.ciiva.com/19460/750670-19460514.pdf?src-supplier=Jameco, ComponentLink2Description=https://datasheet.ciiva.com/11757/0900766b8002dc8a-11757430.pdf?src-supplier=RSComponents, ComponentLink2URL=https://datasheet.ciiva.com/11757/0900766b8002dc8a-11757430.pdf?src-supplier=RSComponents, ComponentLink3Description=https://datasheet.ciiva.com/823/eng-cd-282836-h10-823455.pdf?src-supplier=Digi-Key, ComponentLink3URL=https://datasheet.ciiva.com/823/eng-cd-282836-h10-823455.pdf?src-supplier=Digi-Key, ComponentLink4Description=https://datasheet.ciiva.com/3141/eng-cs-1308389-eurostyle-terminal-blocks-0607-3141577.pdf?src-supplier=Avnet, ComponentLink4URL=https://datasheet.ciiva.com/3141/eng-cs-1308389-eurostyle-terminal-blocks-0607-3141577.pdf?src-supplier=Avnet, ComponentLink5Description=https://datasheet.ciiva.com/26824/getdatasheetpartid-206193-26824087.pdf?src-supplier=Verical, ComponentLink5URL=https://datasheet.ciiva.com/26824/getdatasheetpartid-206193-26824087.pdf?src-supplier=Verical, ComponentLink6Description=https://datasheet.ciiva.com/30161/eng-cs-1308389-eurostyle-terminal-blocks-0607-30161594.pdf?src-supplier=Onlinecomponents.com, ComponentLink6URL=https://datasheet.ciiva.com/30161/eng-cs-1308389-eurostyle-terminal-blocks-0607-30161594.pdf?src-supplier=Onlinecomponents.com, ComponentLink7Description=https://datasheet.ciiva.com/14607/70086278-14607387.pdf?src-supplier=Allied+Electronics, ComponentLink7URL=https://datasheet.ciiva.com/14607/70086278-14607387.pdf?src-supplier=Allied+Electronics, Manufacturer Part Number=282836-4, Pricing 1="1=0.88110, 10=0.77090, 100=0.67770, 500=0.64840, 1000=0.59210, 2500=0.54780, 5000=0.37260, 10000=0.36880 (USD)", RoHS=Yes, Stock 1=3440, Supplier 1="Arrow Electronics"
J13AR: "Conn Power HDR 4 POS 4.2mm Solder RA Thru-Hole 4 Terminal 1 Port Mini-Fit Jr™ Bag", Manufacturer=Molex, Category="Headers and Wire Housings", ComponentLink1Description=https://datasheet.ciiva.com/36179/152300039303041-pcb-headers-36179625.pdf?src-supplier=Onlinecomponents.com, ComponentLink1URL=https://datasheet.ciiva.com/36179/152300039303041-pcb-headers-36179625.pdf?src-supplier=Onlinecomponents.com, ComponentLink2Description=https://datasheet.ciiva.com/7843/1597503-7843936.pdf?src-supplier=Element14, ComponentLink2URL=https://datasheet.ciiva.com/7843/1597503-7843936.pdf?src-supplier=Element14, Manufacturer Part Number=39-30-3041, Pricing 1="1=0.53590, 10=0.50510, 100=0.47270, 1000=0.43130, 5000=0.40490, 10000=0.39350 (USD)", RoHS=Yes, Stock 1=12737, Supplier 1="Arrow Electronics"
MH10AR MH11AR MH12AR MH13AR: "Mounting Hole Non Plated Metric 3"
R10AA_AudioAmp1 R10AA_AudioAmp2 R15AA_AudioAmp1 R15AA_AudioAmp2: "Res Thick Film 1206 47K Ohm 1% 0.25W(1/4W) ±100ppm/C Pad SMD Automotive T/R", Case Code (Imperial)=1206, Case Code (Metric)=3216, Case/Package=Molded, Manufacturer="KOA Speer", Max Operating Temperature=155°C, Min Operating Temperature=-55°C, Power Rating=250mW, Resistance=47kR, Resistance Tolerance=1%, Resistor Type="Thick Film", Temperature Coefficient=100ppm/°C, Voltage Rating=200V, Category="Chip SMD Resistors", ComponentLink1Description=https://datasheet.ciiva.com/22681/549017-22681256.pdf?src-supplier=Element14, ComponentLink1URL=https://datasheet.ciiva.com/22681/549017-22681256.pdf?src-supplier=Element14, ComponentLink2Description=https://datasheet.ciiva.com/5554/rk73h-5554329.pdf?src-supplier=Mouser, ComponentLink2URL=https://datasheet.ciiva.com/5554/rk73h-5554329.pdf?src-supplier=Mouser, ComponentLink3Description=https://datasheet.ciiva.com/48426/rk73h-series-eng-jap-tds-48426457.pdf?src-supplier=Distrelec, ComponentLink3URL=https://datasheet.ciiva.com/48426/rk73h-series-eng-jap-tds-48426457.pdf?src-supplier=Distrelec, Lead Free="Lead Free", Manufacturer Part Number=RK73H2BTTD4702F, Number of Pins=2, Packaging="Tape and Reel", Pricing 1="1=0.10000, 10=0.06000, 100=0.02440, 1000=0.01097, 2500=0.00952 (USD)", REACH SVHC="No SVHC", RoHS=Yes, RoHS Compliant=Yes, Series=RK73H, Stock 1=20654, Supplier 1=Digi-Key, Termination=SMD/SMT, Tolerance=1%, Voltage Rating (DC)=200V
R10LV R11LV R12LV R13LV: Power=1W, Resistance=1.1kOhm, Size=2512
R11AA_AudioAmp1 R11AA_AudioAmp2 R12AA_AudioAmp1 R12AA_AudioAmp2 R19AA_AudioAmp1 R19AA_AudioAmp2: "Thick Film Resistors 1/4W 22K OHM 5%", Case Code (Imperial)=1206, Case Code (Metric)=3216, Manufacturer="KOA Speer", Max Operating Temperature=155°C, Min Operating Temperature=-55°C, Power Rating=250mW, Resistance=22kR, Temperature Coefficient=200ppm/°C, Tolerance=5%, Voltage Rating=200V, Case/Package=1206, Category=Resistors, ComponentLink1Description=https://datasheet.ciiva.com/5557/rk73b-5557031.pdf?src-supplier=Mouser, ComponentLink1URL=https://datasheet.ciiva.com/5557/rk73b-5557031.pdf?src-supplier=Mouser, Lead Free="Lead Free", Manufacturer Part Number=RK73B2BTTDD223J, Packaging="Tape and Reel", Pricing 1="1=0.10000, 10=0.05300, 50=0.05300, 100=0.02200, 1000=0.01000, 10000=0.00600 (USD)", RoHS=Yes, RoHS Compliant=Yes, Series=RK73B, Stock 1=4037, Supplier 1=Mouser, Termination=SMD/SMT
R13AA_AudioAmp1 R13AA_AudioAmp2: "anti-surge thick film chip resistor, 1206, RoHS", Case Code (Imperial)=1206, Case Code (Metric)=3216, Manufacturer="KOA Speer", Max Operating Temperature=155°C, Min Operating Temperature=-55°C, Power Rating=250mW, Resistance=470kR, Temperature Coefficient=200ppm/°C, Tolerance=10%, Voltage Rating=200V, Case/Package=1206, Category="Chip SMD Resistors", ComponentLink1Description=https://datasheet.ciiva.com/5561/sg73-5561962.pdf?src-supplier=Mouser, ComponentLink1URL=https://datasheet.ciiva.com/5561/sg73-5561962.pdf?src-supplier=Mouser, Manufacturer Part Number=SG732BTTD474K, Packaging="Tape and Reel", Pricing 1="1=0.34000, 10=0.29100, 50=0.29100, 100=0.11600, 1000=0.05500, 10000=0.03700 (USD)", RoHS=Yes, RoHS Compliant=Yes, Series=SG73, Stock 1=3298, Supplier 1=Mouser, Termination=SMD/SMT, Voltage Rating (DC)=200V
R14AA_AudioAmp1 R14AA_AudioAmp2 R16AA_AudioAmp1 R16AA_AudioAmp2: "Thick Film Resistors 3.3K OHM 5%", Case Code (Imperial)=1206, Case Code (Metric)=3216, Manufacturer="KOA Speer", Max Operating Temperature=155°C, Min Operating Temperature=-55°C, Power Rating=250mW, Resistance=3.3kR, Temperature Coefficient=200ppm/°C, Tolerance=5%, Voltage Rating=200V, Case/Package=1206, Category=Resistors, ComponentLink1Description=http://www.mouser.com/ds/2/219/RK73B-919.pdf?src-supplier=Mouser, ComponentLink1URL=http://www.mouser.com/ds/2/219/RK73B-919.pdf?src-supplier=Mouser, Lead Free="Lead Free", Manufacturer Part Number=RK73B2BTTDD332J, Packaging="Tape and Reel", Pricing 1="1=0.10000, 10=0.05300, 50=0.05300, 100=0.02200, 1000=0.01000, 10000=0.00700 (USD)", RoHS=Yes, Stock 1=4172, Supplier 1=Mouser, Termination=SMD/SMT
R17AA_AudioAmp1 R17AA_AudioAmp2: "7 Watts Wirewound SMD 470 Milliohms 5% Tape Reel / ARCOL", Manufacturer=Ohmite, Resistance=0R47, Manufacturer Part Number="RWS7 R47 J T&R", Pricing 1="1=2.23000, 10=2.04000, 50=1.92000, 100=1.52000, 1000=0.92700, 10000=0.90000 (USD)", RoHS=Yes, Stock 1=192, Supplier 1=Mouser
R18AA_AudioAmp1 R18AA_AudioAmp2: "Thick Film Resistors - SMD 1/4watts 100Kohms 5%", Case Code (Imperial)=1206, Case Code (Metric)=3216, Manufacturer="KOA Speer", Max Operating Temperature=155°C, Min Operating Temperature=-55°C, Package Quantity=10000, Power Rating=250mW, Resistance=100kR, Resistor Type="Thick Film", Temperature Coefficient=200ppm/°C, Tolerance=5%, Voltage Rating=200V, Case/Package=1206, Category=Resistors, ComponentLink1Description=https://datasheet.ciiva.com/5557/rk73b-5557336.pdf?src-supplier=Mouser, ComponentLink1URL=https://datasheet.ciiva.com/5557/rk73b-5557336.pdf?src-supplier=Mouser, Height=0.6mm, Lead Free="Lead Free", Length=3.2mm, Manufacturer Part Number=RK73B2BTTDD104J, Packaging="Tape and Reel", Pricing 1="1=0.10000, 10=0.05300, 50=0.05300, 100=0.02200, 1000=0.01000, 10000=0.00900 (USD)", RoHS=Yes, Stock 1=4533, Supplier 1=Mouser, Termination=SMD/SMT, Width=1.6mm
R20AA_AudioAmp1 R20AA_AudioAmp2: "Res 10K Ohm 2% 1/4W 1206", Manufacturer="KOA Speer", Max Operating Temperature=155°C, Min Operating Temperature=-55°C, Power Rating=250mW, Resistance=10kR, Resistor Type="Thick Film", Temperature Coefficient=200ppm/°C, Tolerance=2%, Category="Chip SMD Resistors", Height=0.6mm, Length=3.2mm, Manufacturer Part Number=RK73B2BTTD103G, Pricing 1="1=0.10000, 10=0.08800, 50=0.08800, 100=0.03400, 1000=0.01500, 10000=0.01100 (USD)", RoHS=Yes, RoHS Compliant=Yes, Stock 1=2830, Supplier 1=Mouser, Width=1.6mm
R21AA_AudioAmp1 R21AA_AudioAmp2: "Thick Film Resistors - SMD 1/4W 390 OHM 5%", Case Code (Imperial)=1206, Case Code (Metric)=3216, Manufacturer="KOA Speer", Max Operating Temperature=155°C, Min Operating Temperature=-55°C, Package Quantity=10000, Power Rating=250mW, Resistance=390R, Resistor Type="Thick Film", Temperature Coefficient=200ppm/°C, Tolerance=5%, Voltage Rating=200V, Case/Package=1206, Category="Chip SMD Resistors", ComponentLink1Description=http://www.koaspeer.com/catimages/Products/RK73B/RK73B.pdf?src-supplier=Mouser, ComponentLink1URL=http://www.koaspeer.com/catimages/Products/RK73B/RK73B.pdf?src-supplier=Mouser, Height=0.6mm, Lead Free="Lead Free", Length=3.2mm, Manufacturer Part Number=RK73B2BTTDD391J, Packaging="Tape and Reel", Pricing 1="1=0.10000, 10=0.05300, 50=0.05300, 100=0.02200, 1000=0.01000, 10000=0.00600 (USD)", RoHS=Yes, RoHS Compliant=Yes, Series=RK73B, Stock 1=1283, Supplier 1=Mouser, Termination=SMD/SMT, Width=1.6mm
TP10AA_AudioAmp1 TP10AA_AudioAmp2 TP10LV TP11AA_AudioAmp1 TP11AA_AudioAmp2 TP11LV TP12AA_AudioAmp1 TP12AA_AudioAmp2 TP13AA_AudioAmp1 TP13AA_AudioAmp2 TP14AA_AudioAmp1 TP14AA_AudioAmp2 TP15AA_AudioAmp1 TP15AA_AudioAmp2 TP16AA_AudioAmp1 TP16AA_AudioAmp2 TP17AA_AudioAmp1 TP17AA_AudioAmp2 TP18AA_AudioAmp1 TP18AA_AudioAmp2 TP19AA_AudioAmp1 TP19AA_AudioAmp2 TP20AA_AudioAmp1 TP20AA_AudioAmp2 TP21AA_AudioAmp1 TP21AA_AudioAmp2 TP22AA_AudioAmp1 TP22AA_AudioAmp2: "Pad testpoint with 0.75mm Diameter"
U10AA_AudioAmp1 U10AA_AudioAmp2: "Audio Amp Speaker 1-CH Mono 68W Class-AB 11-Pin(11+Tab) TO-220 Rail", Case/Package=TO-220, Dual Supply Voltage=28V, Input Bias Current=1uA, Input Offset Voltage (Vos)=10mV, Manufacturer="TI National Semiconductor", Max Dual Supply Voltage=42V, Max Operating Temperature=85°C, Max Output Current=11.5A, Max Output Power=68W, Max Power Dissipation=125W, Max Supply Voltage=84V, Min Dual Supply Voltage=10V, Min Operating Temperature=-20°C, Min Supply Voltage=20V, Package Quantity=20, Power Supply Rejection Ratio (PSRR)=120dB, Quiescent Current=85mA, Supplier Part Number 1=9493603, Voltage Gain=115dB, Category="Amplifiers - Op Amps, Buffer, Instrumentation", Common Mode Rejection Ratio=85dB, ComponentLink1Description=https://datasheet.ciiva.com/1480/21456-1480999.pdf?src-supplier=Element14, ComponentLink1URL=https://datasheet.ciiva.com/1480/21456-1480999.pdf?src-supplier=Element14, ComponentLink2Description=https://datasheet.ciiva.com/26842/lm3886t-26842547.pdf?src-supplier=IIIC, ComponentLink2URL=https://datasheet.ciiva.com/26842/lm3886t-26842547.pdf?src-supplier=IIIC, Gain Bandwidth Product=8MHz, Height=10.69mm, Length=20.02mm, Load Impedance=8R, Manufacturer Part Number=LM3886T, Mount="Through Hole", Number of Channels=1, Number of Pins=11, Output Current=11.5A, Output Power=68W, Packaging=Rail/Tube, Power Dissipation=125W, Pricing 1="1=6.53000, 10=5.38000, 25=4.98000, 50=4.72000, 100=4.45000, 250=4.23000, 500=3.38000 (EUR)", Radiation Hardening=No, REACH SVHC="No SVHC", RoHS=No, RoHS Compliant=No, Series=Overture™, Supplier 1=Farnell, Supply Type=Single,Dual, Unity Gain Bandwidth Product=8MHz, Weight=0.01lb, Width=4.5mm
U11AA_AudioAmp1 U11AA_AudioAmp2: "LM318-N Single 40V, 15MHZ, High", Case/Package=SOIC, Input Bias Current=500nA, Input Offset Voltage (Vos)=4mV, Manufacturer="TI National Semiconductor", Max Dual Supply Voltage=20V, Max Operating Temperature=70°C, Max Power Dissipation=500mW, Max Supply Current=10mA, Min Dual Supply Voltage=5V, Min Operating Temperature=0°C, Operating Supply Current=5mA, Output Current=20mA, Package Quantity=95, Voltage Gain=106.02dB, -3db Bandwidth=15MHz, Amplifier Type="GENERAL PURPOSE", Category="Amplifiers - Op Amps, Buffer, Instrumentation", Common Mode Rejection Ratio=70dB, ComponentLink1Description=https://datasheet.ciiva.com/25629/0900766b810fa293-25629045.pdf?src-supplier=RSComponents, ComponentLink1URL=https://datasheet.ciiva.com/25629/0900766b810fa293-25629045.pdf?src-supplier=RSComponents, ComponentLink2Description=https://datasheet.ciiva.com/19472/838031-19472597.pdf?src-supplier=Jameco, ComponentLink2URL=https://datasheet.ciiva.com/19472/838031-19472597.pdf?src-supplier=Jameco, ComponentLink3Description=https://datasheet.ciiva.com/14151/oelmx18-data-e-14151388.pdf?src-supplier=Distrelec, ComponentLink3URL=https://datasheet.ciiva.com/14151/oelmx18-data-e-14151388.pdf?src-supplier=Distrelec, ComponentLink4Description=https://datasheet.ciiva.com/2973/lm118-n-2973325.pdf?src-supplier=Avnet, ComponentLink4URL=https://datasheet.ciiva.com/2973/lm118-n-2973325.pdf?src-supplier=Avnet, ComponentLink5Description=https://datasheet.ciiva.com/6626/lm118-n-6626485.pdf?src-supplier=Digi-Key, ComponentLink5URL=https://datasheet.ciiva.com/6626/lm118-n-6626485.pdf?src-supplier=Digi-Key, ComponentLink6Description=https://datasheet.ciiva.com/48712/001010733-da-01-en-ic-op-amp-hi-slew-lm318m-nopb-soic-8-tid-48712454.pdf?src-supplier=Conrad, ComponentLink6URL=https://datasheet.ciiva.com/48712/001010733-da-01-en-ic-op-amp-hi-slew-lm318m-nopb-soic-8-tid-48712454.pdf?src-supplier=Conrad, Contact Plating=Tin,Matte, Gain Bandwidth Product=15MHz, Height=1.5mm, Lead Free="Lead Free", Length=5mm, Manufacturer Part Number=LM318M/NOPB, Max Supply Voltage=20V, Mount="Surface Mount", Nominal Supply Current=10mA, Number of Channels=1, Number of Circuits=1, Number of Elements=1, Number of Pins=8, Operating Supply Voltage=20V, Packaging=Rail/Tube, Power Dissipation=500mW, Pricing 1="1=1.57000, 10=1.41300, 25=1.33280, 100=1.13550, 250=1.06620, 500=0.93294, 1000=0.88013 (USD)", Radiation Hardening=No, RoHS=Yes, RoHS Compliant=Yes, Slew Rate=70V/µs, Stock 1=575, Supplier 1=Digi-Key, Supply Current=10mA, Technology=BIPOLAR, Width=4mm
Z10LV Z11LV: "Vz=15V 14.25V~15.75V Izt=50mA P=1W", Case/Package=SMA, Forward Voltage=1.2V, Manufacturer=Diodes, Max Operating Temperature=150°C, Max Power Dissipation=1W, Max Reverse Current=1uA, Min Operating Temperature=-65°C, Package Quantity=5000, Test Current=50mA, Tolerance=5%, Voltage Rating (DC)=15V, Category="Zener Diodes", ComponentLink1Description=https://datasheet.ciiva.com/15142/getdatasheetpartid-93529-15142590.pdf?src-supplier=Verical, ComponentLink1URL=https://datasheet.ciiva.com/15142/getdatasheetpartid-93529-15142590.pdf?src-supplier=Verical, ComponentLink2Description=https://datasheet.ciiva.com/4734/ds18015-38228-4734232.pdf?src-supplier=Mouser, ComponentLink2URL=https://datasheet.ciiva.com/4734/ds18015-38228-4734232.pdf?src-supplier=Mouser, ComponentLink3Description=https://datasheet.ciiva.com/893/ds18015-893402.pdf?src-supplier=Digi-Key, ComponentLink3URL=https://datasheet.ciiva.com/893/ds18015-893402.pdf?src-supplier=Digi-Key, ComponentLink4Description=https://datasheet.ciiva.com/893/ds18015-893401.pdf?src-supplier=Digi-Key, ComponentLink4URL=https://datasheet.ciiva.com/893/ds18015-893401.pdf?src-supplier=Digi-Key, Element Configuration=Single, Height=2.09mm, Impedance=10R, Lead Free="Lead Free", Length=4.6mm, Manufacturer Part Number=SMAZ15-13-F, Max Reverse Leakage Current=1uA, Mount="Surface Mount", Number of Pins=2, Packaging="Tape and Reel", Power Dissipation=1W, Power Rating=1W, Pricing 1="5=0.47100, 50=0.29300, 250=0.20100, 1000=0.15400 (EUR)", Radiation Hardening=No, RoHS=Yes, RoHS Compliant=Yes, Series=-, Stock 1=7565, Supplier 1=Farnell, Termination=SMD/SMT, Voltage Tolerance=5%, Weight=0.002258oz, Width=2.92mm, Working Voltage=15V, Zener Current=1uA, Zener Voltage=15V